# Altium PCB Copy of PCB1.PcbDoc (part 1 of 2)
Units mil, origin at the board's own origin, x right, y up, seen from the top; angles counter-clockwise.
Board outline 966 x 2841 mil, 4 copper layers (Top Layer, GND, POWER, Bottom Layer), stack 23.756 mil thick; 134 components, 79 nets, 491 pads, 121 vias.
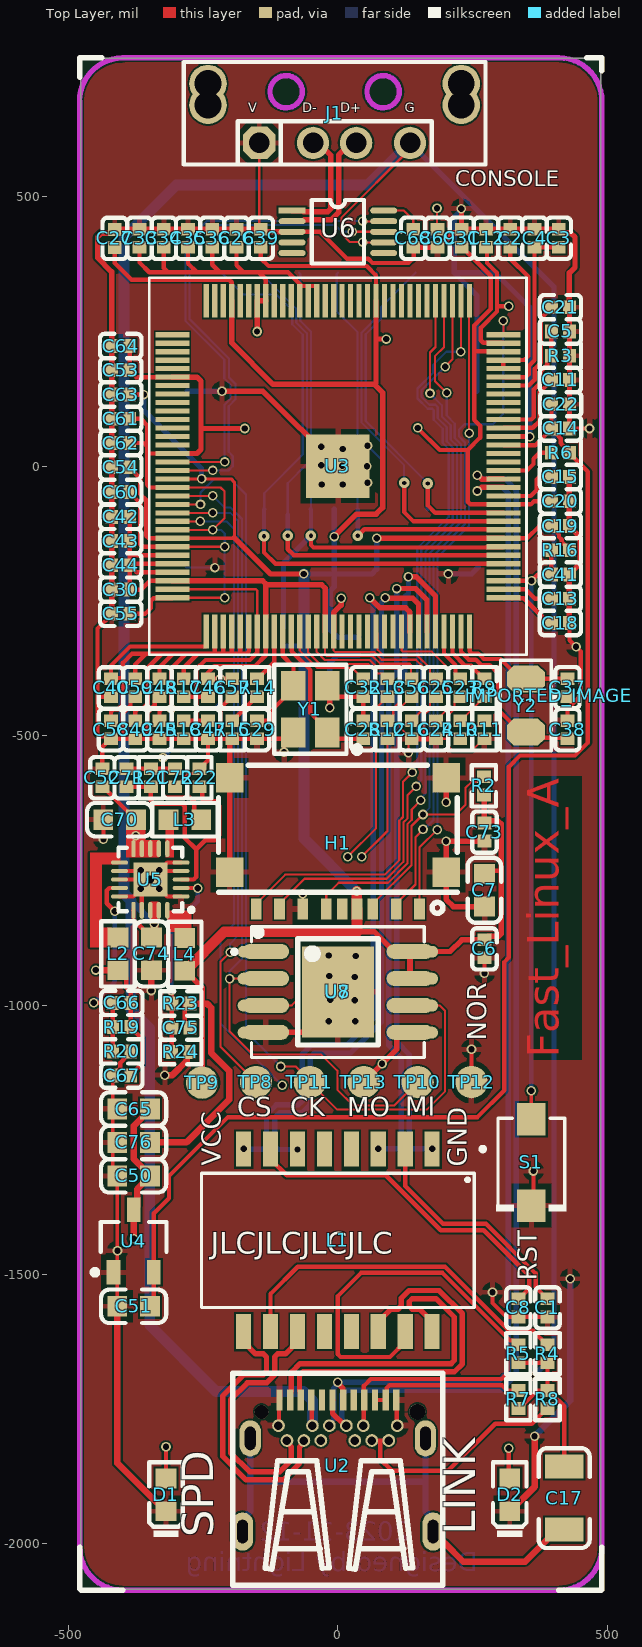
[diagram p0: Top Layer view]
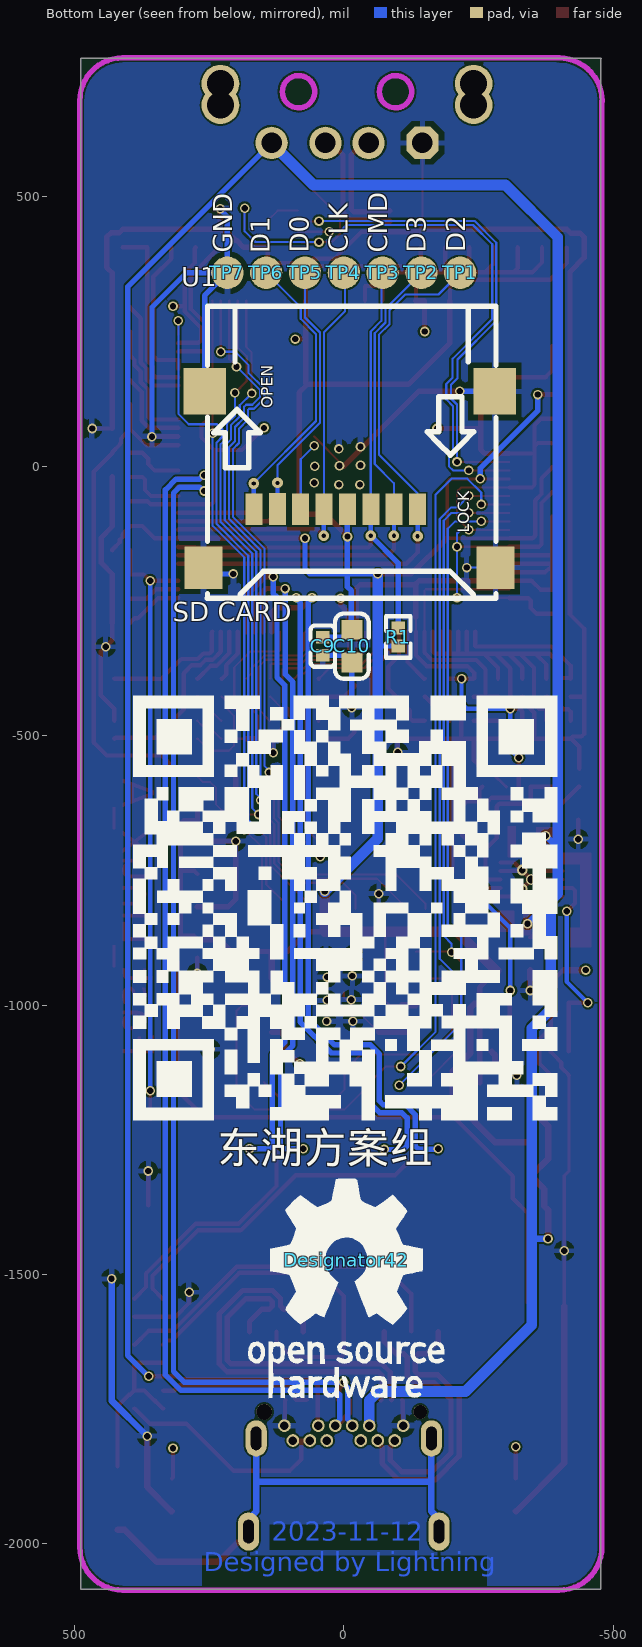
[diagram p1: Bottom Layer view, seen from below]
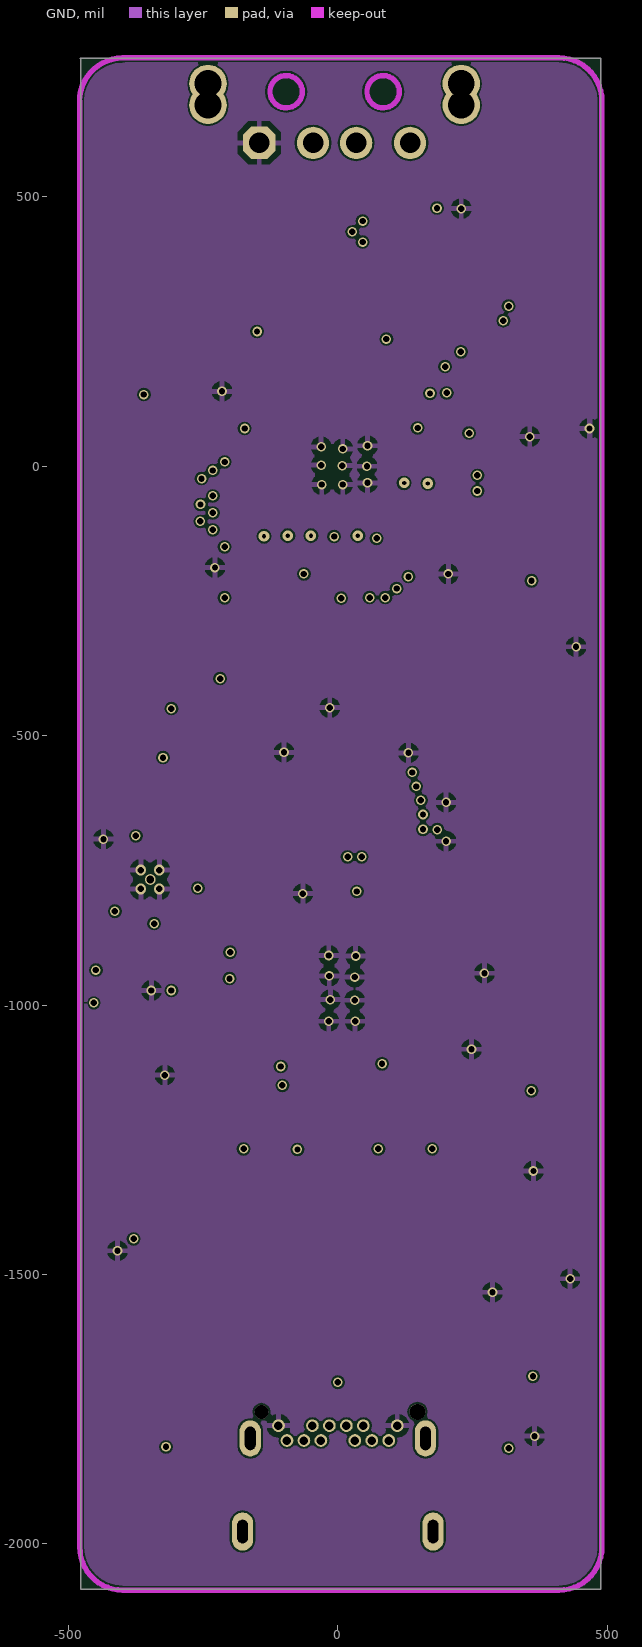
[diagram p2: GND]
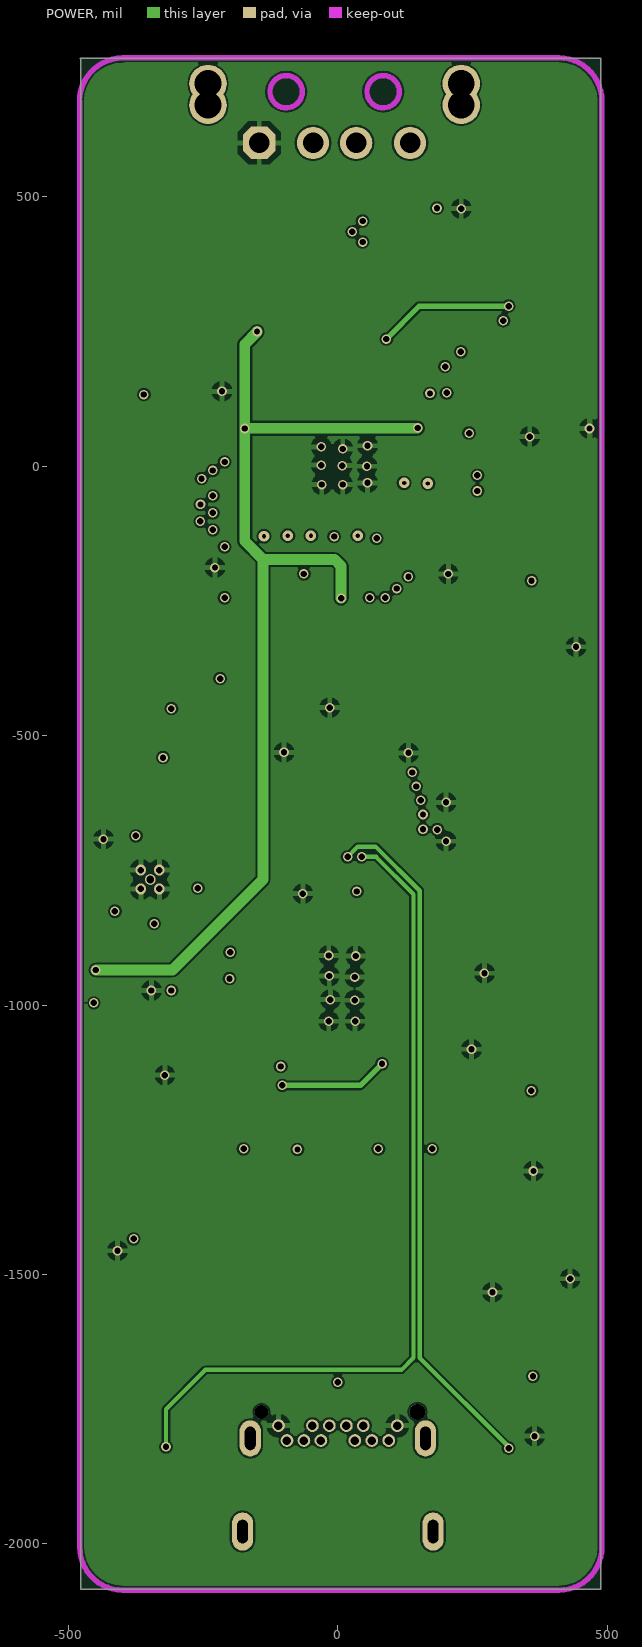
[diagram p3: POWER]

## Layer stack, top to bottom
Top Solder: solder mask 0.4, Solder Resist, Dk 3.5
Top Layer: signal copper 1.4
Dielectric 2: prepreg 2.8, PP-006, Dk 4.1
GND: signal copper 1.378
Dielectric 1: dielectric 12.6, FR-4, Dk 4.8
POWER: signal copper 1.378
Dielectric 3: prepreg 2.8, PP-006, Dk 4.1
Bottom Layer: signal copper 1.4
Bottom Solder: solder mask 0.4, Solder Resist, Dk 3.5

## Board outline
-478,757 -477,756 -477,-2084 488,-2084 488,757

## Design rules (kind name [scope] priority, off if disabled: settings)
Clearance [All] p1: gap=3.5 ignorepadtopadclearanceinfootprint=FALSE
DiffPairsRouting [All] p1: maxlimit=10 minlimit=3.5 mostfreqgap=5 toplayer_minwidth=3.5 toplayer_maxwidth=15 toplayer_prefwidth=10 midlayer1_minwidth=3.5 midlayer1_maxwidth=15 midlayer1_prefwidth=10 midlayer2_minwidth=3.5 midlayer2_maxwidth=15 midlayer2_prefwidth=10 bottomlayer_minwidth=3.5 bottomlayer_maxwidth=15 bottomlayer_prefwidth=10 maxuncoupledlength=500
PolygonConnect [All] p1: connectstyle=Relief reliefconductorwidth=10 reliefentries=4 polygonreliefangle="90 Angle" airgapwidth=10
RoutingVias [All] p1: holewidth=28 width=50 viastyle="Through Hole" minholewidth=28 minwidth=50 maxholewidth=28 maxwidth=50
SolderMaskExpansion [All] p1: expansion=4 istentingtop=FALSE
Width [All] p1: maxlimit=100 minlimit=3.5 preferedwidth=12
29 further rules are at their usual default settings.

## Classes and differential pairs
differential pair TXD: +TXD_p -TXD_n
differential pair RXD: +RXD_p -RXD_n
differential pair TX: +TX_p -TX_n
differential pair RX: +RX_p -RX_n
differential pair D: +D_p -D_n
differential pair CH340: +CH340_p -CH340_n

## Components (designator, comment, footprint, x,y, rotation, side; value= is the part's Value field where it differs from the comment)
C1 "100nF" 0402_C 389,-1562 r270 top
C2 "10uF6.3V" 0402_C 320,423 r270 top
C3 "100nF" 0402_C 410,423 r90 top
C4 "10uF6.3V" 0402_C 365,423 r270 top
C5 "10uF6.3V" 0402_C 413,250 r180 top
C6 "100nF" 0402_C 272,-895.73 r90 top
C7 "10uF 10V" 0603_C 272,-787 r90 top
C8 "100nF" 0402_C 335,-1562 r270 top
C9 "100nF" 0402_C 39,-334 r90 bottom
C10 "10uF 10V" 0603_C -15,-334 r90 bottom locked
C11 "1.0uF (105) 10% 25V" 0402_C 413,160 r180 top
C12 "100nF" 0402_C 275,423 r270 top
C13 "100nF" 0402_C 413,-246 r180 top
C14 "1nF" 0402_C 413.27,70 r0 top
C15 "100nF" 0402_C 413,-20 r180 top
C16 "100nF" 0402_C 137,-489 r90 top
C17 "1nF (102) 10% 500V" 1206_C 420,-1915 r90 top
C18 "10uF" 0402_C 413,-291 r0 top
C19 "100nF" 0402_C 413,-111 r180 top
C20 "100nF" 0402_C 413,-65 r180 top
C21 "100nF" 0402_C 413,295 r180 top
C22 "100nF" 0402_C 413.33,114.98 r180 top
C23 "100nF" 0402_C 227,-411 r90 top
C24 "100nF" 0402_C 182,-489 r90 top
C25 "100nF" 0402_C 182,-411 r90 top
C26 "100nF" 0402_C -188,423 r270 top
C27 "100nF" 0402_C -414,422.73 r270 top
C28 "12pF (120) 5% 50V" 0402_C 47,-489 r270 top
C29 "12pF (120) 5% 50V" 0402_C -150,-489 r90 top
C30 "100nF" 0402_C -403,-229 r0 top
C31 "100nF" 0402_C 230,423 r270 top
C32 "100nF" 0402_C 47,-411 r90 top
C33 "100nF" 0402_C -368,423 r270 top
C34 "100nF" 0402_C -323,423 r270 top
C35 "100nF" 0402_C -278,423 r270 top
C36 "100nF" 0402_C -233,423 r270 top
C37 "12pF" 0402_C 426,-411 r90 top locked
C38 "12pF" 0402_C 426,-489 r270 top locked
C39 "100nF" 0402_C -143,423 r270 top
C40 "100nF" 0402_C -421,-411.27 r90 top
C41 "100nF" 0402_C 413,-201 r180 top
C42 "100nF" 0402_C -403,-94 r0 top
C43 "100nF" 0402_C -403,-139 r0 top
C44 "100nF" 0402_C -403,-184 r0 top
C45 "100nF" 0402_C -331,-489 r90 top
C46 "100nF" 0402_C -241,-411 r90 top
C47 "100nF" 0402_C -241,-489 r90 top
C48 "100nF" 0402_C -331,-411 r90 top
C49 "100nF" 0402_C -376,-489 r90 top
C50 "10uF 10V" 0603_C -379,-1317 r0 top
C51 "10uF 10V" 0603_C -379,-1559 r0 top
C52 "1.0uF 25V" 0402_C -437,-578.27 r270 top
C53 "100nF" 0402_C -403,178 r0 top
C54 "100nF" 0402_C -403,-2 r0 top
C55 "100nF" 0402_C -403,-274 r0 top
C56 "100nF" 0402_C 137,-411 r90 top
C57 "100nF" 0402_C -196,-411 r90 top
C58 "100nF" 0402_C -421,-489 r90 top
C59 "100nF" 0402_C -376,-411 r90 top
C60 "100nF" 0402_C -403,-48 r0 top
C61 "100nF" 0402_C -403,88 r0 top
C62 "100nF" 0402_C -402.73,43 r0 top
C63 "100nF" 0402_C -403,133 r0 top
C64 "100nF" 0402_C -403,223 r0 top
C65 "10uF 10V" 0603_C -379,-1193 r0 top
C66 "18pF 50V" 0402_C -401,-996 r0 top
C67 "10uF 6.3V" 0402_C -401,-1131 r0 top
C68 "100nF" 0402_C 140,423 r90 top
C69 "100nF" 0402_C 185,423 r90 top
C70 "10uF 10V" 0603_C -405,-656 r0 top locked
C71 "18pF 50V" 0402_C -392,-578.27 r90 top
C72 "10uF 6.3V" 0402_C -302,-578.27 r90 top
C73 "100nF" 0402_C 272,-679 r90 top
C74 "10uF 10V" 0603_C -346,-905 r90 top locked
C75 "18pF 50V" 0402_C -291.27,-1042 r0 top
C76 "10uF 10V" 0603_C -379,-1255 r0 top
D1 "蓝灯 0603" 0603_LED_S1 -319,-1909 r90 top locked
D2 "绿灯 0603" 0603_LED_S1 319,-1909 r90 top locked
Designator42 "Comment" OPEN_SOURCE -5,-1473 r180 bottom
H1 "SD_HEADER" SD_HEADER 0,-700 r0 top locked
IMPORTED_IMAGE "IMPORTED_IMAGE" IMPORTED_IMAGE 391,-426 r180 top
J1 "USB type A 公头" USBAM -146,600 r0 top
L1 "B1603S" SOIC-16_L12.7-W7.1-P1.27-LS9.5-BL 0,-1436.63 r180 top locked
L2 "Inductor" 0603_L -408,-905 r270 top locked value=10mH
L3 "Inductor" 0603_L -284,-656 r0 top value=10mH
L4 "Inductor" 0603_L -284,-906 r270 top value=10mH
R1 "10KΩ ±1%" 0402_R -101,-317 r270 bottom
R2 "10KΩ ±1%" 0402_R 271,-593.27 r90 top
R3 "200KΩ" 0402_R 413,205 r180 top
R4 "75Ω" 0402_R 389,-1647 r90 top
R5 "75Ω" 0402_R 335,-1647 r90 top
R6 "100KΩ" 0402_R 413,25 r0 top
R7 "75Ω" 0402_R 335,-1732 r270 top
R8 "75Ω" 0402_R 389,-1732 r90 top
R9 "3.9KΩ(3901) ±1%" 0402_R 272,-411 r270 top
R10 "2KΩ (2001) ±1%" 0402_R 227,-489 r270 top
R11 "100Ω (1000) ±1%" 0402_R 272,-489 r270 top
R12 "300Ω" 0402_R 92,-489 r270 top
R13 "300Ω" 0402_R 92,-411 r270 top
R14 "120Ω (1200) ±1%" 0402_R -150,-411 r270 top
R15 "120Ω (1200) ±1%" 0402_R -196,-489 r270 top
R16 "10KΩ" 0402_R 413,-156 r0 top
R17 "2KΩ (2001) ±1%" 0402_R -286,-411 r270 top
R18 "2KΩ (2001) ±1%" 0402_R -286,-489 r270 top
R19 "150KΩ (1503) ±1%" 0402_R -401,-1041 r0 top
R20 "150KΩ (1503) ±1%" 0402_R -401,-1086 r180 top
R21 "200KΩ  ±1%" 0402_R -347,-578.27 r90 top
R22 "100KΩ (1003) ±1%" 0402_R -257,-578.27 r90 top
R23 "680KΩ (6803) ±1%" 0402_R -291.27,-997 r0 top
R24 "150KΩ (1503) ±1%" 0402_R -291.54,-1087 r0 top
S1 "RST#" SW-3*4-2P 359,-1292 r270 top
TP1 "test-point" POINT#1 -216,359 r180 bottom
TP2 "test-point" POINT#1 -144,359 r90 bottom
TP3 "test-point" POINT#1 -72,359 r90 bottom
TP4 "test-point" POINT#1 0,359 r90 bottom
TP5 "test-point" POINT#1 72,359 r90 bottom
TP6 "test-point" POINT#1 144,359 r90 bottom
TP7 "test-point" POINT#2 216,359 r90 top
TP8 "test-point" POINT#3 -222,-1143 r90 top
TP9 "test-point" POINT#4 -367,-1104 r90 top
TP10 "test-point" POINT#5 233,-1143 r90 top
TP11 "test-point" POINT#6 -67,-1143 r90 top
TP12 "test-point" POINT#7 358,-1143 r90 top
TP13 "test-point" POINT#8 93,-1143 r90 top
U1 "SD卡座" tf103 258.27,138.86 r180 bottom locked
U2 "Socket" "USB type C 24 pin" 0,-1855 r0 top locked
U3 "FunKey_V3S" ELQFP-128 0,0 r90 top locked
U4 "LDO1117" SOT-23-3L -379,-1438 r270 top
U5 "DC-DC" QFN20_3X3 -348,-767 r90 top locked
U6 "CH340E" MSOP10 0,435 r270 top locked
U7 "SPI-NOR" WSON8 0,-976 r270 top locked
U8 "W25Q128JVSIQTR" SOIC-8_208mil 0,-975.67 r270 top locked
Y1 "25MHZ 12PF 10PPM" SMD-3225_4P -51,-451 r90 top locked
Y2 "32768Hz" 3225-2 349,-395 r270 top

## Footprints (in the part's own frame and the unit in brackets; to place one, negate y for a bottom-side part, rotate by r counter-clockwise, add the part's x,y. Pads: shape width x height; smd on the part's side, far side on the other; paste and mask are expansions set on the pad)
0402_C [mm]
  rect 0.6x0.65 smd mask+0.051: 1(-0.425,0) 2(0.425,0)
  silkscreen extent -0.97,-0.58 0.97,0.58, body extent -0.48,-0.3 0.52,0.3, height 0.2
0402_R [mm]
  rect 0.6x0.65 smd mask+0.051: 1(-0.425,0) 2(0.425,0)
  silkscreen extent -0.97,-0.58 0.97,0.58, body extent 0,0 0,0
0603_C [mm]
  rect 0.93x0.98 smd: 1(-0.77,0) 2(0.77,0)
  silkscreen extent -1.53,-0.79 1.54,0.79, body extent -0.8,-0.4 0.8,0.4, height 0.3
0603_L [mm]
  rect 0.93x0.98 smd: 1(-0.77,0) 2(0.77,0)
  silkscreen extent -1.53,-0.79 1.54,0.79, body extent -0.82,-0.41 0.83,0.41, height 0.46
0603_LED_S1 [mm]
  rect 0.93x0.98 smd: A(0.77,0) K(-0.77,0)
  silkscreen extent -1.98,-0.79 1.54,0.79, body extent -0.8,-0.4 0.8,0.4, height 0.6
1206_C [mm]
  rect 1.13x1.8 smd: 1(-1.49,0) 2(1.49,0)
  silkscreen extent -2.36,-1.2 2.35,1.2, body extent -1.6,-0.81 1.6,0.79, height 1
3225-2 [mil] "32768"
  oct 50x70 smd: 1(0,0) 2(98.43,0)
  silkscreen extent -35,-47 133,47
ELQFP-128 [mm]
  rect 3x3 smd: 0(0,0)
  rect 1.6x0.247 smd paste+0 mask+0.102: 1(7.8,-6.2) 2(7.8,-5.8) 3(7.8,-5.4) 4(7.8,-5) 5(7.8,-4.6) 6(7.8,-4.2) 7(7.8,-3.8) 8(7.8,-3.4) 9(7.8,-3) 10(7.8,-2.6) 11(7.8,-2.2) 12(7.8,-1.8) 13(7.8,-1.4) 14(7.8,-1) 15(7.8,-0.6) 16(7.8,-0.2) 17(7.8,0.2) 18(7.8,0.6) 19(7.8,1) 20(7.8,1.4) 21(7.8,1.8) 22(7.8,2.2) 23(7.8,2.6) 24(7.8,3) 25(7.8,3.4) 26(7.8,3.8) 27(7.8,4.2) 28(7.8,4.6) 29(7.8,5) 30(7.8,5.4) 31(7.8,5.8) 32(7.8,6.2) 65(-7.8,6.2) 66(-7.8,5.8) 67(-7.8,5.4) 68(-7.8,5) 69(-7.8,4.6) 70(-7.8,4.2) 71(-7.8,3.8) 72(-7.8,3.4) 73(-7.8,3) 74(-7.8,2.6) 75(-7.8,2.2) 76(-7.8,1.8) 77(-7.8,1.4) 78(-7.8,1) 79(-7.8,0.6) 80(-7.8,0.2) 81(-7.8,-0.2) 82(-7.8,-0.6) 83(-7.8,-1) 84(-7.8,-1.4) 85(-7.8,-1.8) 86(-7.8,-2.2) 87(-7.8,-2.6) 88(-7.8,-3) 89(-7.8,-3.4) 90(-7.8,-3.8) 91(-7.8,-4.2) 92(-7.8,-4.6) 93(-7.8,-5) 94(-7.8,-5.4) 95(-7.8,-5.8) 96(-7.8,-6.2)
  rect 0.247x1.6 smd paste+0 mask+0.102: 33(6.2,7.8) 34(5.8,7.8) 35(5.4,7.8) 36(5,7.8) 37(4.6,7.8) 38(4.2,7.8) 39(3.8,7.8) 40(3.4,7.8) 41(3,7.8) 42(2.6,7.8) 43(2.2,7.8) 44(1.8,7.8) 45(1.4,7.8) 46(1,7.8) 47(0.6,7.8) 48(0.2,7.8) 49(-0.2,7.8) 50(-0.6,7.8) 51(-1,7.8) 52(-1.4,7.8) 53(-1.8,7.8) 54(-2.2,7.8) 55(-2.6,7.8) 56(-3,7.8) 57(-3.4,7.8) 58(-3.8,7.8) 59(-4.2,7.8) 60(-4.6,7.8) 61(-5,7.8) 62(-5.4,7.8) 63(-5.8,7.8) 64(-6.2,7.8) 97(-6.2,-7.8) 98(-5.8,-7.8) 99(-5.4,-7.8) 100(-5,-7.8) 101(-4.6,-7.8) 102(-4.2,-7.8) 103(-3.8,-7.8) 104(-3.4,-7.8) 105(-3,-7.8) 106(-2.6,-7.8) 107(-2.2,-7.8) 108(-1.8,-7.8) 109(-1.4,-7.8) 110(-1,-7.8) 111(-0.6,-7.8) 112(-0.2,-7.8) 113(0.2,-7.8) 114(0.6,-7.8) 115(1,-7.8) 116(1.4,-7.8) 117(1.8,-7.8) 118(2.2,-7.8) 119(2.6,-7.8) 120(3,-7.8) 121(3.4,-7.8) 122(3.8,-7.8) 123(4.2,-7.8) 124(4.6,-7.8) 125(5,-7.8) 126(5.4,-7.8) 127(5.8,-7.8) 128(6.2,-7.8)
  silkscreen extent -8.89,-8.89 8.89,8.89
IMPORTED_IMAGE [mil]
MSOP10 [mil]
  rect 11x50 smd mask+2: 1(-39.37,-85)
  oval 11x50 smd mask+2: 2(-19.68,-85) 3(0,-85) 4(19.69,-85) 5(39.37,-85) 6(39.37,85) 7(19.69,85) 8(0,85) 9(-19.68,85) 10(-39.37,85)
  silkscreen extent -59,-48 59,48
OPEN_SOURCE [mil] "LOGO"
  silkscreen extent -182,-256 182,151
POINT#1 [mil] "测试点"
  round 60 smd: 1(0,0)
POINT#2 [mil] "测试点"
  round 60 smd far side: 1(0,0)
POINT#3 [mil] "测试点"
  round 60 smd: 1(0,-70)
POINT#4 [mil] "测试点"
  round 60 smd: 1(-40,-115)
POINT#5 [mil] "测试点"
  round 60 smd: 1(0,85)
POINT#6 [mil] "测试点"
  round 60 smd: 1(0,-15)
POINT#7 [mil] "测试点"
  round 60 smd: 1(0,110)
POINT#8 [mil] "测试点"
  round 60 smd: 1(0,45)
QFN20_3X3 [mm]
  rect 1.6x1.6 smd mask+0.051: 0(0,0)
  round 0.508 hole 0.356: 0(0,0)
  oval 0.2x0.8 smd mask+0.051: 1(-0.8,-1.451) 2(-0.4,-1.451) 3(0,-1.451) 4(0.4,-1.451) 5(0.8,-1.451) 11(0.8,1.451) 12(0.4,1.451) 13(0,1.451) 14(-0.4,1.451) 15(-0.8,1.451)
  oval 0.8x0.2 smd mask+0.051: 6(1.451,-0.8) 7(1.451,-0.4) 8(1.451,0) 9(1.451,0.4) 10(1.451,0.8) 16(-1.451,0.8) 17(-1.451,0.4) 18(-1.451,0) 19(-1.451,-0.4) 20(-1.451,-0.8)
  silkscreen extent -1.53,-2.03 1.5,1.5
SD_HEADER [mm] "针对货号C2982548"
  rect 0.5x1 smd paste+0 mask+0.051: 1(3.85,-3.092) 2(2.75,-3.092) 3(1.65,-3.092) 4(0.9,-3.092) 5(-0.55,-3.092) 6(-1.65,-3.092) 7(-2.75,-3.092) 8(-3.85,-3.092) 9(0.2,-3.092)
  rect 1.3x1.4 smd paste+0 mask+0.051: 10(-5.1,-1.357) 11(-5.1,3.092) 12(5.1,3.092) 13(5.1,-1.357)
  silkscreen extent -5.62,-3.29 5.62,3.69
SMD-3225_4P [mm]
  rect 1.4x1.15 smd: 1(-1.1,-0.8) 2(1.1,-0.8) 3(1.1,0.8) 4(-1.1,0.8)
  silkscreen extent -2.1,-2.35 2.1,1.7, body extent -1.6,-1.25 1.6,1.25, height 0.61
SOIC-8_208mil [mm]
  oval 0.7x2.2 smd: 1(-1.905,-3.4) 2(-0.635,-3.4) 3(0.635,-3.4) 4(1.905,-3.4) 5(1.905,3.4) 6(0.635,3.4) 7(-0.635,3.4) 8(-1.905,3.4)
  silkscreen extent -2.95,-3.9 2.5,1.9
SOIC-16_L12.7-W7.1-P1.27-LS9.5-BL [mil]
  rect 28x65.51 smd: 1(-175,-169.37) 2(-125,-169.37) 3(-75,-169.37) 4(-25,-169.37) 5(25,-169.37) 6(75,-169.37) 7(125,-169.37) 8(175,-169.37) 9(175,169.37) 10(125,169.37) 11(75,169.37) 12(25,169.37) 13(-25,169.37) 14(-75,169.37) 15(-125,169.37) 16(-175,169.37)
  silkscreen extent -273,-173 253,125
SOT-23-3L [mm] "http://www.aosmd.com/res/packaging_information/SOT-23-3L.pdf"
  rect 1.15x0.65 smd: 1(1.475,-0.95) 2(1.475,0.95) 3(-1.475,0)
  silkscreen extent -0.9,-1.95 1.6,1.55, body extent -0.9,-1.55 0.9,1.55, height 1.25
SW-3*4-2P [mm] "开关"
  rect 1.53x1.36 smd: 1(-2.035,0) 2(2.035,0)
  silkscreen extent -2.08,-1.65 2.3,1.65
tf103 [mm] "翻盖式TF卡座"
  rect 0.8x1.5 smd: 1(10.032,-5.559) 2(8.932,-5.559) 3(7.832,-5.559) 4(6.732,-5.559) 5(5.631,-5.559) 6(4.528,-5.559) 7(3.427,-5.551) 8(2.325,-5.559)
  rect 2x2.2 smd: 9(13.67,0) 10(0,0)
  rect 1.8x2 smd: 11(-0.05,-8.304) 12(13.71,-8.304)
  silkscreen extent 0.12,-9.75 13.74,4
"USB type C 24 pin" [mm] "前插后贴"
  oval 1x1.7 hole 0.5 slot 1.1 at 90 deg: 1(-4.13,1.29) 4(4.13,1.29)
  oval 1x1.8 hole 0.5 slot 1.1 at 90 deg: 2(-4.49,-3.1) 3(4.49,-3.1)
  rect 0.3x1 smd: A1(-2.75,3.1) A2(-2.25,3.1) A3(-1.75,3.1) A4(-1.25,3.1) A5(-0.75,3.1) A6(-0.25,3.1) A7(0.25,3.1) A8(0.75,3.1) A9(1.25,3.1) A10(1.75,3.1) A11(2.25,3.1) A12(2.75,3.1)
  round 0.6 hole 0.4: B1(2.8,1.89) B2(2.4,1.19) B3(1.6,1.19) B4(1.2,1.89) B5(0.8,1.19) B6(0.4,1.89) B7(-0.4,1.89) B8(-0.8,1.19) B9(-1.2,1.89) B10(-1.6,1.19) B11(-2.4,1.19) B12(-2.8,1.89)
  round 0.65 hole 0.65 unplated: ""(-3.6,2.54)
  round 0.75 hole 0.75 unplated: ""(3.75,2.54)
  silkscreen extent -4.95,-5.63 4.95,4.37
USBAM [mil]
  round 70 hole 50: 0(-95,70) 0(-95,110) 0(375,70) 0(375,110)
  oct 60x60 hole 38: 1(0,0)
  round 60 hole 38: 2(100,0) 3(180,0) 4(280,0)
  Keep-Out Layer circle w10: c230,95 r30
  Keep-Out Layer circle w10: c50,95 r30
  silkscreen extent -140,-40 420,150
WSON8 [mil] "比如W25Q256"
  oval 22x55.1 smd mask+2: 1(-75,-158.6) 2(-25,-158.6) 3(25,-158.6) 4(75,-158.6) 5(75,158.6) 6(25,158.6) 7(-25,158.6) 8(-75,158.6)
  rect 169.3x133.9 smd mask+2: 9(0,0)
  silkscreen extent -121,-196 121,161

## Part data
C1 C3 C6 C8 C9 C12 C13 C15 C16 C19 C20 C21 C22 C23 C24 C25 C26 C27 C30 C31 C32 C33 C34 C35 C36 C39 C40 C42 C43 C44 C45 C46 C47 C48 C49 C53 C54 C55 C56 C57 C58 C59 C60 C61 C62 C63 C64 C68 C69 C73: library part "0603 100nF (104) 10% 50V", "贴片电容", Package=0603, SuppliersPartNumber=C14663, ComponentLink1Description=供应商链接, ComponentLink1URL=http://www.szlcsc.com/product/details_15331.html, Supplier=LC
C2 C4 C5 C18 C67 C72: library part "0402 10uF (106) 20% 6.3V", "贴片电容", Package=0402, SuppliersPartNumber=C15525, ComponentLink1Description=供应商链接, ComponentLink1URL=http://www.szlcsc.com/product/details_16204.html, Supplier=LC
C7 C10 C50 C51 C65 C70 C74 C76: library part "0603 10uF (106) 10% 10V", "贴片电容", Package=0603, SuppliersPartNumber=C19702, ComponentLink1Description=供应商链接, ComponentLink1URL=http://www.szlcsc.com/product/details_20411.html, Supplier=LC
C11 C52: library part "0402 1.0uF (105) 10% 25V", "贴片电容", Package=0402, SuppliersPartNumber=C52923, ComponentLink1Description=供应商链接, ComponentLink1URL=http://www.szlcsc.com/product/details_53938.html, Supplier=LC
C14: library part "0402 1nF (102) 10% 50V", "贴片电容", Package=0402, SuppliersPartNumber=C1523, ComponentLink1Description=供应商链接, ComponentLink1URL=http://www.szlcsc.com/product/details_1875.html, Supplier=LC
C17: library part "1206 1nF (102) 10% 500V", "贴片电容", Package=1206, SuppliersPartNumber=C35216, ComponentLink1Description=供应商链接, ComponentLink1URL=http://www.szlcsc.com/product/details_36187.html, Supplier=LC
C28 C29: library part "0603 12pF (120) 5% 50V", "贴片电容", Package=0603, SuppliersPartNumber=C38523, ComponentLink1Description=供应商链接, ComponentLink1URL=http://www.szlcsc.com/product/details_39506.html, Supplier=LC
C37 C38: library part CAP, "Capacitor"
C41: library part "0402 100nF (104) 10% 16V", "贴片电容", Package=0402, SuppliersPartNumber=C1525, ComponentLink1Description=供应商链接, ComponentLink1URL=http://www.szlcsc.com/product/details_1877.html, Supplier=LC
C66 C71 C75: library part "0402 18pF (180) 5% 50V", "贴片电容", Package=0402, SuppliersPartNumber=C1549, ComponentLink1Description=供应商链接, ComponentLink1URL=http://www.szlcsc.com/product/details_1901.html, Supplier=LC
D1: library part "0603 蓝灯", "发光二极管", Package=0603, SuppliersPartNumber=C72041, ComponentLink1Description=供应商链接, ComponentLink1URL=http://www.szlcsc.com/product/details_73150.html, Supplier=LC
D2: library part "0603 绿灯", "发光二极管", Package=0603, SuppliersPartNumber=C72043, ComponentLink1Description=供应商链接, ComponentLink1URL=http://www.szlcsc.com/product/details_73152.html, Supplier=LC
H1: "贴片单插式SD卡"
J1: library part "C42605 母座贴片", "货号对应"
L1: JLCPCB Part Class="Extended Part", LCSC Part Name=单口百兆网络隔离变压器, Manufacturer=CND-tek(磁联达), Add into BOM=yes, Convert to PCB=yes, Datasheet=https://atta.szlcsc.com/upload/public/pdf/source/20220621/E46676EAD779E5D7558DAB86D017A6AD.pdf, Device=B1603S, Manufacturer Part=B1603S, Name=B1603S, Supplier=LCSC, Supplier Footprint=SOIC-16-7.1mm, Supplier Part=C3003215, Symbol=B1603S
R1 R2 R16: library part "0402 10KΩ (1002) 1%", "贴片电阻", Package=0402, SuppliersPartNumber=C25744, ComponentLink1Description=供应商链接, ComponentLink1URL=http://www.szlcsc.com/product/details_26487.html, Supplier=LC
R3 R21: library part "0402 200KΩ (2003) 1%", "贴片电阻", Package=0402, SuppliersPartNumber=C25764, ComponentLink1Description=供应商链接, ComponentLink1URL=http://www.szlcsc.com/product/details_26507.html, Supplier=LC
R4 R5 R7 R8: library part "0402 75Ω (75R0) 1%", "贴片电阻", Package=0402, SuppliersPartNumber=C25133, ComponentLink1Description=供应商链接, ComponentLink1URL=http://www.szlcsc.com/product/details_25876.html, Supplier=LC
R6 R22: library part "0402 100KΩ (1003) 1%", "贴片电阻", Package=0402, SuppliersPartNumber=C25741, ComponentLink1Description=供应商链接, ComponentLink1URL=http://www.szlcsc.com/product/details_26484.html, Supplier=LC
R9: library part "0402 3.9KΩ(3901) 1%", "贴片电阻", Package=0402, SuppliersPartNumber=C51721, ComponentLink1Description=供应商链接, ComponentLink1URL=http://www.szlcsc.com/product/details_52734.html, Supplier=LC
R10 R17 R18: library part "0402 2KΩ (2001) 1%", "贴片电阻", Package=0402, SuppliersPartNumber=C4109, ComponentLink1Description=供应商链接, ComponentLink1URL=http://www.szlcsc.com/product/details_4516.html, Supplier=LC
R11: library part "0402 100Ω (1000) 1%", "贴片电阻", Package=0402, SuppliersPartNumber=C25076, ComponentLink1Description=供应商链接, ComponentLink1URL=http://www.szlcsc.com/product/details_25819.html, Supplier=LC
R12 R13: library part "0402 300Ω (3000) 1%", "贴片电阻", Package=0402, SuppliersPartNumber=C25102, ComponentLink1Description=供应商链接, ComponentLink1URL=http://www.szlcsc.com/product/details_25845.html, Supplier=LC
R14 R15: library part "0402 120Ω (1200) 1%", "贴片电阻", Package=0402, SuppliersPartNumber=C25079, ComponentLink1Description=供应商链接, ComponentLink1URL=http://www.szlcsc.com/product/details_25822.html, Supplier=LC
R19 R20 R24: library part "0402 150KΩ (1503) 1%", "贴片电阻", Package=0402, SuppliersPartNumber=C25755, ComponentLink1Description=供应商链接, ComponentLink1URL=http://www.szlcsc.com/product/details_26498.html, Supplier=LC
R23: library part "0603 680KΩ (6803) 1%", "贴片电阻", Package=0603, SuppliersPartNumber=C25822, ComponentLink1Description=供应商链接, ComponentLink1URL=http://www.szlcsc.com/product/details_26565.html, Supplier=LC
S1: library part KEY1
TP1 TP2 TP3 TP4 TP5 TP6 TP7 TP8 TP9 TP10 TP11 TP12 TP13: "测试点"
U1: library part TF103
U2: library part "USB type C 沉板公头"
U4: "LDO"
U5: library part RY1303A, "3CH-DCDC"
U6: "USB TO UART TTL"
U7: library part W25Q64, "NOR FLASH"
U8: library part W25Q128JVSIQTR_[C97521], "Flash ROM", Package=SOIC-8, SuppliersPartNumber=C97521, ComponentLink1Description=供应商链接, ComponentLink1URL=https://item.szlcsc.com/98729.html, Supplier=LC
Y1: library part "SMD-3225_4P  25MHZ 12PF 10PPM", "贴片晶振", Package=SMD-3225_4P, SuppliersPartNumber=C9006, ComponentLink1Description=供应商链接, ComponentLink1URL=http://www.szlcsc.com/product/details_9526.html, Supplier=LC
Y2: library part XTAL, "Crystal Oscillator", LatestRevisionDate=17-Jul-2002, LatestRevisionNote="Re-released for DXP Platform.", PackageDescription="Crystal, Thru-Hole; 2 Leads; Body 3.1 x 8.2 mm (Dia.xH)", PackageReference=R38, Published=8-Jun-2000, Publisher="Altium Limited"
L2 L3 L4: Code_IEC=1005, Code_JEITA=0402, LatestRevisionDate=29-May-2009, LatestRevisionNote="IPC-7351 Footprint Added.", PackageDescription="Chip Inductor", PackageReference=0402-A, Published=8-Jun-2000, Publisher="Altium Limited"
U3: Contributor=mlpzaq9998, spicePre=U, spiceSymbolName=FunKey_V3S

## Via types
v1: diameter 17.72, hole 11.81, Top Layer to Bottom Layer, 111 vias
v2: diameter 19.68, hole 7.87, Top Layer to Bottom Layer, 6 vias
v3: diameter 20, hole 12, Top Layer to Bottom Layer, tented both sides, 4 vias

## Nets (pads, with @x,y where several pads share a name; then routed paths per layer and width w, separated by ;. In a path a pad name is that pad's centre, name@x,y a point inside that pad or via, vN(x,y) a via of type N, cw(c..) or ccw(c..) an arc to the next point about the centre after c; other vN are vias at no path point)
1V2_CPU: C16.2 C20.2 C26.2 C31.2 C33.2 C34.2 C35.2 C36.2 C53.2 C55.2 C60.2 C61.2 C62.2 C64.2 C66.2 C67.2 L2.2 R19.2 U3.19 U3.20 U3.21 U3.25 U3.26 U3.38 U3.47 U3.51 U3.56 U3.58 U3.64 U3.80 U3.108 U3.126 | length 5815.2
  Top Layer w4: U3.64@-307.09,-244.09 v1(-210.09,-244.09) ; U3.58@-307.09,-149.61 v1(-210.09,-149.61) ; U3.56@-307.09,-118.11 v1(-232.09,-118.11) -210.09,-96.11 -210.09,-47 -217.71,-39.38 U3.51@-307.09,-39.38 ; U3.80@-7.88,-307.09 -7.88,-342.29 -5.53,-344.63 67.11,-344.63 81.55,-359.08 144.74,-359.08 158,-372.34 158,-451.27 147.8,-461.47 147.8,-462.46 137.98,-472.27 C16.2@137,-472.27
  Top Layer w8: L2.2@-408,-935.32 -407.02,-935.32 -392.71,-949.62 -392.71,-967.29 -384.27,-975.73 C66.2@-384.27,-996 R19.2@-384.27,-1041 -384.27,-1041.98 -363,-1063.25 -363,-1108.75 -384.27,-1130.02 C67.2@-384.27,-1131 ; C55.2@-386.27,-274 -358,-274 -347,-263 -347,-249.65 -342.31,-244.97 -307.95,-244.97 U3.64@-307.09,-244.09 ; C60.2@-386.27,-48 -386.27,-48.98 -366.96,-68.3 -366.96,-144.92 -362.27,-149.61 U3.58@-307.09,-149.61 ; C61.2@-386.27,88 -366,88 -354,76 -354,37 ; C64.2@-386.27,223 C53.2@-386.27,178 -386.27,177.02 -374.61,165.36 U3.38@-307.09,165.36 ; C62.2@-386.13,43.13 C62.2@-386,43 -386,42.02 -385.02,43 -360,43 -354,37 ; C33.2@-368,406.27 -368,378 -350,360 -315,360 ; C34.2@-323,406.27 -323,368 -315,360 ; U3.51@-307.09,-39.38 -349.31,-39.38 -354,-34.69 -354,22.61 ; U3.47@-307.09,23.61 -353,23.61 -354,22.61 ; C35.2@-278,406.27 -278,376 -262,360 ; C36.2@-233,406.27 -233,374 -219,360 ; C26.2@-188,406.27 -188,373 -175,360 ; U3.25@-133.86,307.09 -133.86,346.86 -147,360 ; U3.21@-70.86,307.09 -71.74,307.95 -71.74,339.18 ; U3.19@-39.36,307.09 -39.36,333.71 -40.24,334.58 -67.14,334.58 -71.74,339.18 ; v1(148,71) 189,30 241,30 ; C31.2@230,406.27 230.98,406.27 283.76,353.49 283.76,291.76 253,261 253,214 ; U3.126@307.09,212.59 306.22,213.47 253.53,213.47 253,214 ; C20.2@396.27,-65 364.02,-65 358.15,-70.86 U3.108@307.09,-70.86 245.86,-70.86 241,-66 241,30 ; -354,22.61 -354,37 ; -315,360 -262,360 ; -262,360 -219,360 ; -219,360 -175,360 ; -175,360 -147,360 ; -147,360 -92.56,360 -71.74,339.18 ; 241,30 264,53 264,75 253,86 253,214
  Top Layer w10: U3.47@-307.09,23.61 -261.39,23.61 -254,31 -254,70 ; U3.38@-307.09,165.36 -261.36,165.36 -254,158 -254,70 ; v1(-173,70) -254,70 ; v1(-150,250) -149.74,250.26 -149.74,306.95 U3.26@-149.61,307.09 U3.25@-133.86,307.09 ; U3.80@-7.88,-307.09 -7.74,-306.96 -7.74,-271.59 6,-257.85 v1(6,-245)
  Top Layer w12: v1(-449,-935) -408.32,-935 L2.2@-408,-935.32
  POWER w10: v1(-173,70) v1@-172.5,70.5 ; v1@147.5,70.5 v1(148,71)
  POWER w20: v1(-449,-935) -307,-935 -138.99,-766.99 -138.99,-173 ; v1@-172.5,70.5 v1@147.5,70.5 ; v1(-150,250) -150,249 -173,226 v1(-173,70) -173,-138.99 -138.99,-173 ; v1(6,-245) 6,-185 -6,-173 -138.99,-173
  Bottom Layer w4: v1(-232.09,-118.11) -216.89,-118.11 -210,-125 -210,-149.52 v1(-210.09,-149.61) v1(-210.09,-244.09)
1V2_EPHY: C24.2 U3.88 | length 241.3
  Top Layer w4: U3.88@118.11,-307.09 118.61,-307.59 118.61,-342.24 120.46,-344.08 174.08,-344.08 203.3,-373.3 203.3,-450.97 192.8,-461.47 192.8,-462.46 182.98,-472.27 C24.2@182,-472.27
1V8_DRAM: C30.2 C40.2 C42.2 C43.2 C44.2 C45.2 C46.2 C48.2 C49.2 C56.2 C57.2 C58.2 C59.2 C71.2 C72.2 L3.2 R17.1 R21.2 U3.59 U3.60 U3.61 U3.62 U3.65 U3.66 U3.67 U3.68 U3.69 U3.70 U3.72 U3.79 | length 3185.1
  Top Layer w4: U3.72@-133.86,-307.09 U3.72@-133.86,-280.59 ; -133.86,-218.46 -132.32,-220 ; U3.79@-23.61,-307.09 -23.61,-348.61 -20.1,-352.13 64,-352.13 78.45,-366.58 133.67,-366.58 136.02,-368.93 136.02,-394.27 C56.2@137,-394.27
  Top Layer w8: C58.2@-421,-472.27 -421,-455.69 -416.31,-451 -407.78,-451 -399,-442.22 -399,-393 ; C71.2@-392,-561.54 R21.2@-347,-561.54 -324.5,-561.54 ; C42.2@-386.27,-94 C43.2@-386.27,-139 C44.2@-386.27,-184 C44.2@-386.27,-184.98 ; C44.2@-382.39,-181.11 U3.60@-307.09,-181.11 ; -382.41,-165.36 U3.59@-307.09,-165.36 ; C49.2@-376,-472.27 -376,-454.69 -371.31,-450 -362.28,-450 -353,-440.72 -353,-374 -327,-348 ; C59.2@-376,-394.27 -376,-368 -356,-348 ; C45.2@-331,-472.27 -331,-454.73 -326.31,-450.05 v1(-309,-450) v1(-309,-450) -309,-375 -282,-348 ; C48.2@-331,-394.27 -331,-373 -306,-348 ; v1@-324.5,-541.5 -324.5,-561.54 ; U3.62@-307.09,-212.61 -348.61,-212.61 -365,-229 C30.2@-386.27,-229 C44.2@-386.27,-184.98 ; U3.61@-307.09,-196.86 -373.41,-196.86 -377.47,-192.8 -378.46,-192.8 C44.2@-386.27,-184.98 ; C72.2@-301.02,-561.54 C72.2@-302,-561.54 -324.5,-561.54 ; R17.1@-286,-394.27 -286,-374 -260,-348 ; L3.2@-253.68,-656 -266.49,-643.19 -266.49,-622.84 -274.33,-615 -319.81,-615 -324.5,-610.31 -324.5,-561.54 ; U3.65@-244.09,-307.09 -244.09,-333.71 -244.97,-334.58 -385.58,-334.58 -421,-370 C40.2@-421,-394.54 -419.46,-393 -399,-393 ; U3.66@-228.34,-307.09 -228.38,-307.13 -228.38,-344.38 -232,-348 ; U3.67@-212.59,-307.09 -212.59,-346.59 -214,-348 ; U3.68@-196.84,-307.09 -196.84,-348 ; C57.2@-196,-394.27 v1(-218.5,-394.27) C46.2@-241,-394.27 -242,-393.27 -242,-383.68 -229.32,-371 -153.86,-371 -133.86,-351 U3.72@-133.86,-307.09 ; U3.69@-181.09,-307.09 -181.09,-348 ; U3.70@-165.36,-307.09 -165,-307.44 -165,-343.31 -169.69,-348 -181.09,-348 ; -399,-393 -399,-365 -382,-348 -356,-348 ; -356,-348 -327,-348 ; -327,-348 -306,-348 ; -306,-348 -282,-348 ; -282,-348 -260,-348 ; -260,-348 -232,-348 ; -232,-348 -214,-348 ; -214,-348 -196.84,-348 ; -196.84,-348 -181.09,-348
  Top Layer w10: U3.62@-307.09,-212.61 -139.71,-212.61 -133.86,-218.46 U3.72@-133.86,-280.59 ; -132.32,-220 -30,-220 -23.61,-226.39 U3.79@-23.61,-307.09
  Top Layer w11: C72.2@-301.02,-561.54 C72.2@-294.7,-567.85
  Bottom Layer w8: v1(-324.5,-540.95) -309,-525.45 v1(-309,-450) -228,-450 -218.5,-440.5 v1(-218.5,-394.27)
3V3_EPHY: C23.2 U3.93 | length 100.2
  Top Layer w8: U3.93@196.85,-307.09 196.85,-347.86 218.2,-369.2 218.2,-386.46 226.02,-394.27 C23.2@227,-394.27
3V3_HP: C21.2 U3.122 | length 210
  Top Layer w8: U3.122@307.09,149.61 354.33,149.61 365.46,160.73 365.46,180.67 376.96,192.17 376.96,274.7 396.27,294.02 C21.2@396.27,295
3V3_IO: C6.2 C7.2 C9.2 C10.2 C12.2 C19.2 C27.2 C39.2 C54.2 C63.2 C73.2 C75.2 C76.2 H1.4 L4.2 R1.2 R2.1 R16.2 R23.2 TP9.1 U1.4 U3.12 U3.29 U3.50 U3.57 U3.104 U3.127 U7.3 U7.7 U7.8 U8.3 U8.7 U8.8 | length 6412.7
  Top Layer w4: U8.3@-107.67,-1000.67 -85.67,-1000.67 -77,-992 -77,-864
  Top Layer w6: U3.57@-307.09,-133.86 -191.14,-133.86 ; U3.50@-307.09,-23.62 -197.86,-23.62 -192,-29.48 -192,-133
  Top Layer w8: C27.2@-414,406 -414,377.08 -383,346.08 -201.77,346.08 -197,341.31 -197,307.24 U3.29@-196.84,307.09 ; C54.2@-386.27,-2 -386.27,-2.98 -366.96,-22.3 -366.96,-51.5 -355.46,-63 -355.46,-129.18 -350.77,-133.86 U3.57@-307.09,-133.86 ; R23.2@-284,-997 -284,-1031.55 -274.54,-1041.02 C75.2@-274.54,-1042 ; C39.2@-143,406.27 -143,386 -128.5,371.5 53.5,371.5 70.86,354.14 U3.12@70.86,307.09 ; C7.2@272,-756.68 277.69,-751 303,-751 ; C12.2@275,406.27 276.86,404.41 276.86,377.14 295.26,358.74 295.26,297 ; U3.104@307.09,-133.86 351.14,-133.86 374,-111 C19.2@396.27,-111 396.27,-111.98 410.42,-126.14 410.42,-131.3 415.58,-136.46 415.58,-140.86 429.73,-155.02 R16.2@429.73,-156 ; U3.127@307.09,228.34 306.22,229.22 269.69,229.22 265,233.9 265,256.74 295.26,287 295.26,297 ; v1(317,297) 295.26,297
  Top Layer w10: C63.2@-386.27,133 v1(-360,133) ; L4.2@-284,-936.32 -283.02,-936.32 -252,-967.33 -252,-998 TP9.1@-252,-1144 ; U3.29@-196.84,307.09 -196.84,228.84 -120,152 67.86,152 ; -192,-133 -191.14,-133.86 -125,-200 v1(-63,-200) ; v1(-6.88,-130.57) 34.69,-89 71,-89 83,-77 83,136.86 67.86,152 ; H1.4@35.22,-821.53 H1.4@35.43,-821.75 ; 35.43,-864 67.67,-864 104.33,-900.67 U8.8@133.86,-900.67 208.33,-900.67 230,-879 C6.2@272,-879 278.81,-872.19 298.81,-872.19 303,-868 303,-751 303,-663.86 297.14,-658 275.27,-658 271.5,-661.77 271.5,-610.5 R2.1@271,-610 ; U3.12@70.86,307.09 70.86,236 ; v1(72,-134) 72.14,-133.86 U3.104@307.09,-133.86 ; v1(90,236) 70.86,236 ; 67.86,152 70.86,155 70.86,236
  Top Layer w12: C76.2@-348.68,-1255 -281,-1255 -202,-1176 -202,-1122 -235,-1089 -235,-1005.03 -242.03,-998 -252,-998 -273.54,-998 R23.2@-274.54,-997 ; U8.3@-133.86,-1000.67 U8.3@-107.67,-1000.67 ; U8.7@133.86,-950.67 U8.8@133.86,-900.67
  Top Layer w20: L4.2@-283.02,-936.32 -210.7,-864 -77,-864 35.43,-864 H1.4@35.43,-821.75 ; H1.4@35.22,-821.53 v1(35.22,-789.22)
  POWER w10: v1(90,236) 151,297 v1(317,297)
  Bottom Layer w10: v1(-360,133) -360,103 -253,-4 v1(-253,-23) ; R1.2@-101,-333.73 -63.27,-333.73 -63,-334 ; v1(-63,-200) -6.76,-200 ; U1.4@-6.76,-80 -6.76,-200 ; C9.2@39,-317.27 -0.43,-317.27 -14.02,-303.68 C10.2@-15,-303.68 -14,-302.68 -14,-231 -6.76,-223.76 -6.76,-200 ; v1(72,-134) 72,-191 63,-200 -6.76,-200
  Bottom Layer w20: v1(-63,-200) -63,-334 -63,-691 v1(35.22,-789.22)
3V3_MCSI: C25.2 U3.85 | length 169.8
  Top Layer w4: U3.85@70.86,-307.09 73.73,-309.96 73.73,-340.66 84.66,-351.58 147.85,-351.58 171.2,-374.94 171.2,-384.46 C25.2@181.02,-394.27
3V3_RTC: C13.2 U3.98 | length 96.5
  Top Layer w8: U3.98@307.09,-228.34 348.35,-228.34 366,-246 C13.2@396.27,-246
3V3_USB: C15.2 U3.109 | length 115
  Top Layer w8: U3.109@307.09,-55.12 357.88,-55.12 369,-44 369,-24.69 373.69,-20 C15.2@396.27,-20
3V_AVCC: C14.1 C22.2 C51.2 R6.2 U3.115 U4.2 | length 2471.9
  Top Layer w8: C51.2@-348.68,-1559 -341.6,-1551.91 U4.2@-341.6,-1496.07 -341.6,-1386.6 -313.5,-1358.5 -313.5,-1317.5 -204,-1208 259,-1208 309,-1158 309,-920 317,-912 317,-558 338,-537 440,-537 464,-513 464,-10.25 429.73,24.02 R6.2@429.73,25 429.73,25.98 415.58,40.14 415.58,40.9 413.39,43.09 413.39,51.39 410.69,54.1 410.69,54.86 C14.1@396.54,69.02 ; U3.115@307.09,39.36 307.81,38.64 366.16,38.64 C14.1@396.54,69.02 ; C14.1@396.54,70 C14.1@396.54,69.02 ; C14.1@396.57,70.03 C22.2@396.57,114.95
3V_PLL: C32.2 U3.76 | length 174.6
  Top Layer w4: U3.76@-70.86,-307.09 -70.86,-342.26 -38.49,-374.63 26.38,-374.63 C32.2@46.02,-394.27
  Top Layer w8: C32.2@46.02,-394.27 C32.2@47,-394.27
CH340_n: J1.3 U6.2 | length 241.3
  Top Layer w10: U6.2@-85,454.68 -65.23,454.68 -62.89,457.03 -12.64,457.03 1.5,471.17 1.5,577.14 24.36,600 J1.3@34,600
CH340_p: J1.2 U6.1 | length 216.4
  Top Layer w10: U6.1@-85,474.37 -65.5,474.37 -63.16,472.03 -18.86,472.03 -13.5,477.39 -13.5,577.14 -36.36,600 J1.2@-46,600
D_n: U2.A7 U2.B7 U3.110 | length 2182.9
  Top Layer w10: v1(0,-1700) 0.14,-1700 0.14,-1702.23 8.94,-1711.03 8.94,-1732.04 U2.A7@9.85,-1732.95 ; 267.09,-39 280.35,-39 280.72,-39.38 U3.110@307.09,-39.38
  Bottom Layer w10: U2.B7@-15.75,-1780.59 -15.75,-1776.9 -7.5,-1768.65 -7.5,-1710.59 1,-1702.09 0,-1701.09 v1(0,-1700) ; v1@1.11,-1700.11 295.89,-1700.11 316,-1680 316,-50 305,-39 268.09,-39 261.09,-46 v1(259,-46)
D_p: U2.A6 U2.B6 U3.111 | length 2236.1
  Top Layer w10: U2.A6@-9.84,-1732.95 -10,-1733.11 -10,-1757.61 12.97,-1780.59 U2.B6@15.74,-1780.59 ; v1(259,-17) 260.09,-17 267.09,-24 280.35,-24 280.72,-23.62 U3.111@307.09,-23.62
  Bottom Layer w10: U2.B6@15.74,-1780.59 15.74,-1776.9 7.5,-1768.65 7.5,-1723.5 15.89,-1715.11 302.11,-1715.11 331,-1686.21 331,-43.79 311.21,-24 268.09,-24 261.09,-17 v1(259,-17)